# Altium PCB AD9834.PcbDoc
Units mil, origin at the board's own origin, x right, y up, seen from the top; angles counter-clockwise.
Board outline 1968.5 x 1771.65 mil, 2 copper layers (Top Layer, Bottom Layer); 42 components, 32 nets, 138 pads, 55 vias.
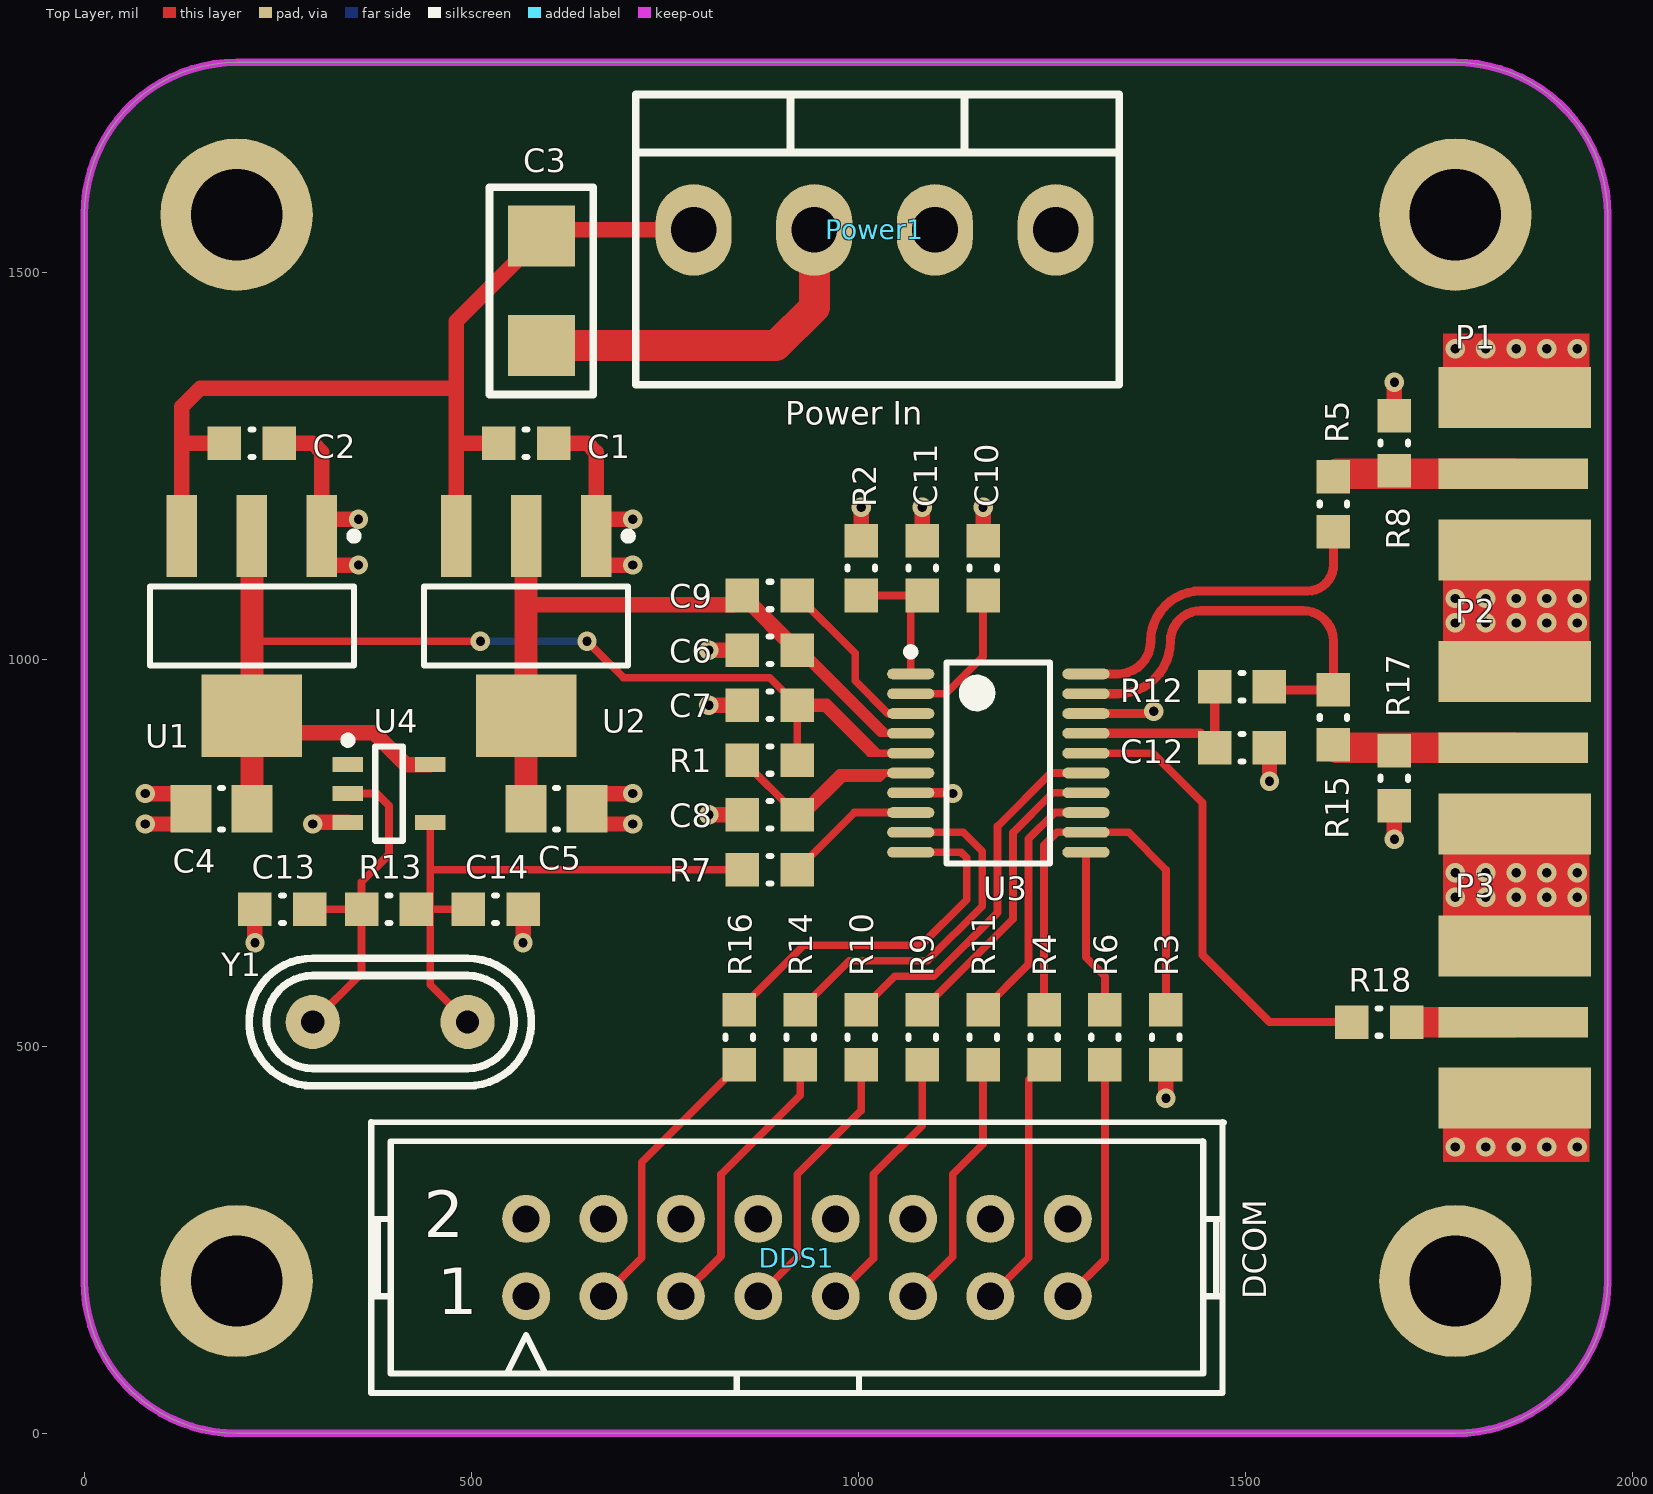
[diagram p0: Top Layer view]
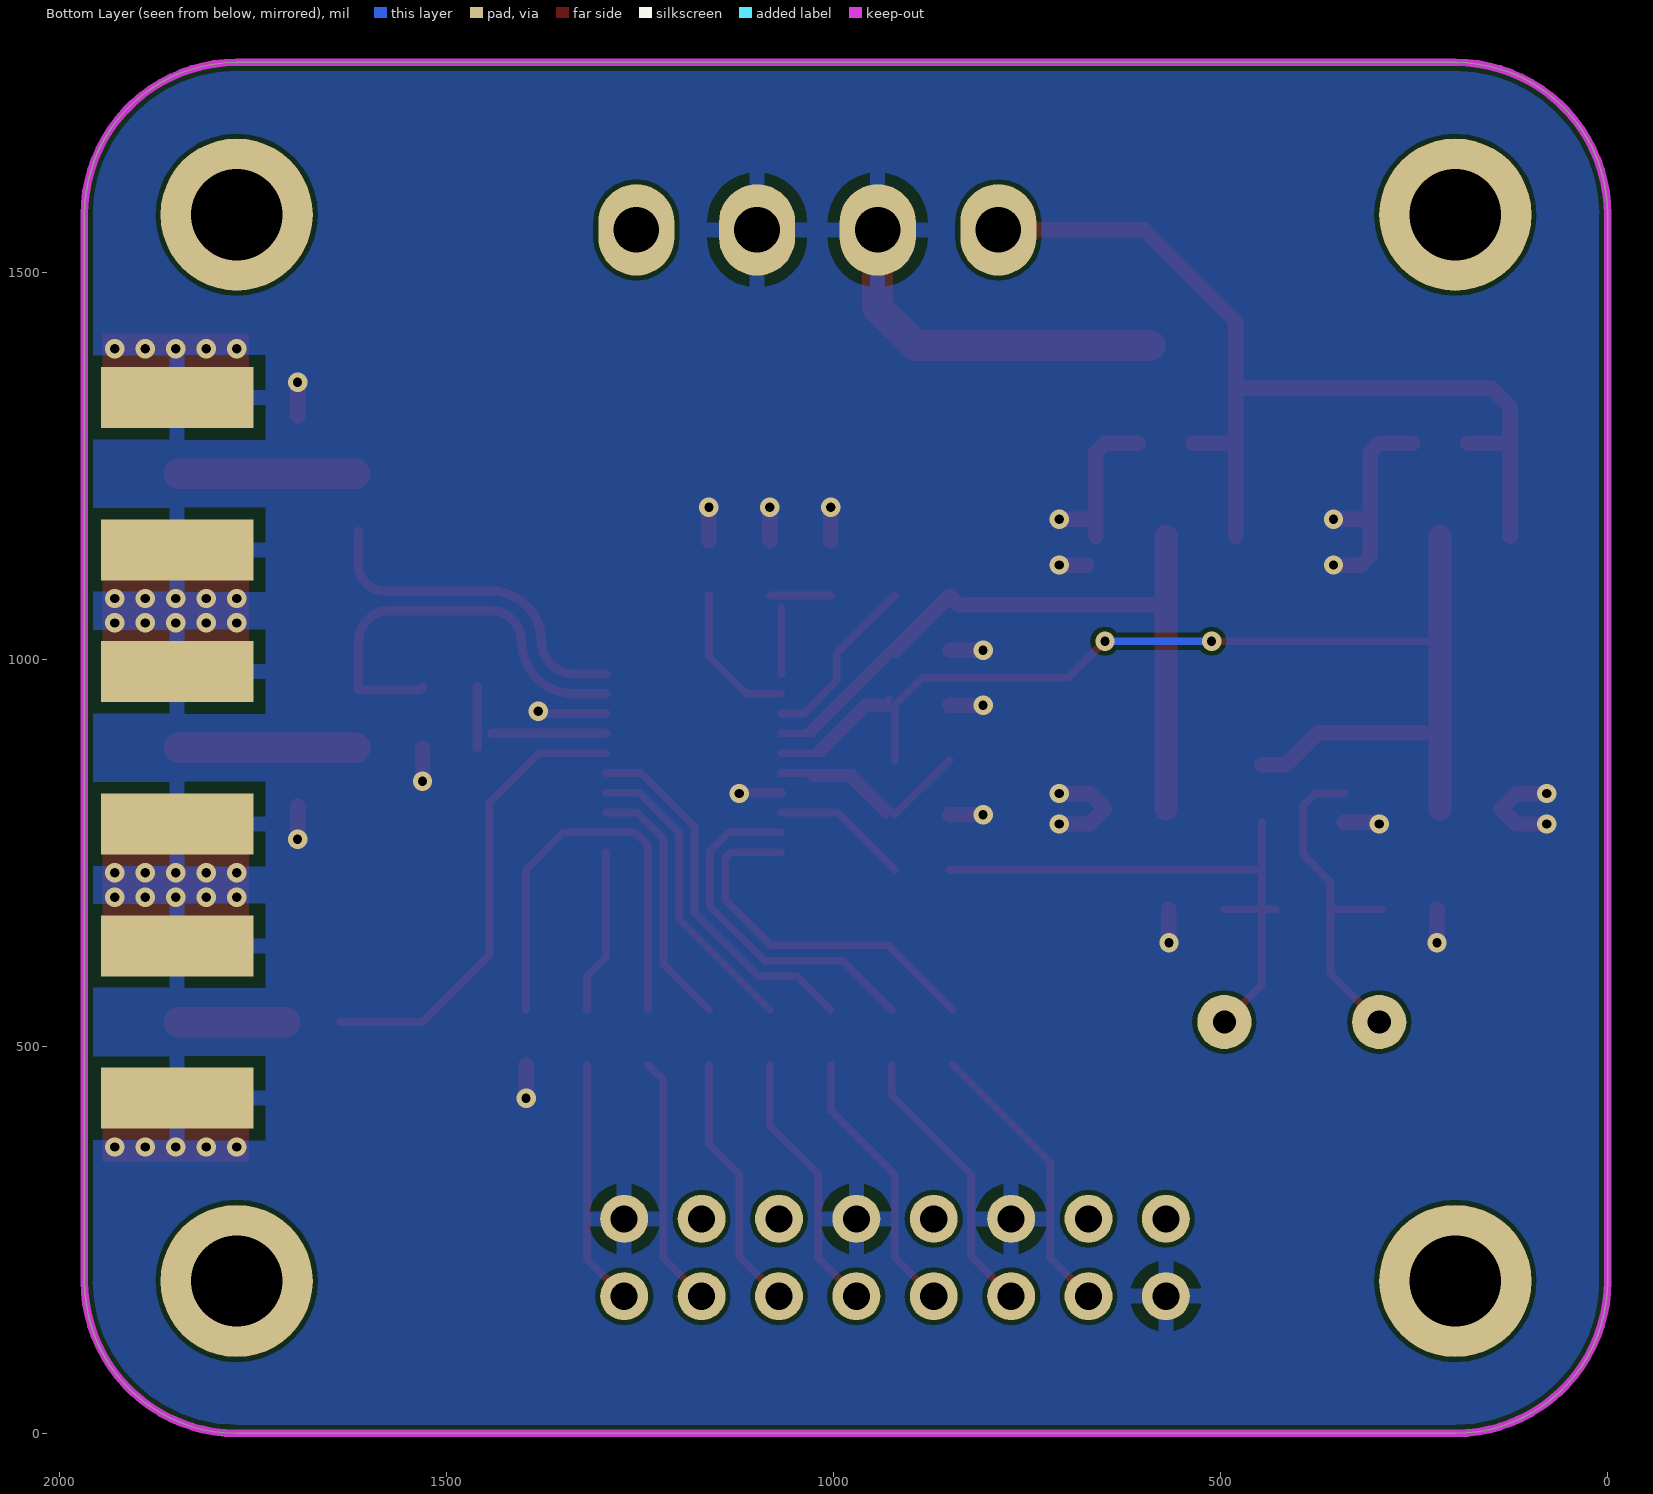
[diagram p1: Bottom Layer view, seen from below]

## Layer stack, top to bottom
Top Solder: solder mask 0.4, Solder Resist, Dk 3.5
Top Layer: signal copper 1.4
Dielectric 1: dielectric 12.6, FR-4, Dk 4.8
Bottom Layer: signal copper 1.4
Bottom Solder: solder mask 0.4, Solder Resist, Dk 3.5

## Board outline
196.85,0 cw(c196.85,196.85) 0,196.85 0,1574.8 cw(c196.85,1574.8) 196.85,1771.65 1771.65,1771.65 cw(c1771.65,1574.8) 1968.5,1574.8 1968.5,196.85 cw(c1771.65,196.85) 1771.65,0

## Design rules (kind name [scope] priority, off if disabled: settings)
Clearance [All] p1: gap=6
HoleSize [All] p1: absolutevalues=TRUE maxlimit=99999 minlimit=12 maxpercent=80.000 minpercent=20.000
PolygonConnect PolygonConnect_1 [IsVia] p1: connectstyle=Direct reliefconductorwidth=10 reliefentries=4 polygonreliefangle="90 Angle" airgapwidth=10
PolygonConnect [All] p2: connectstyle=Relief reliefconductorwidth=20 reliefentries=4 polygonreliefangle="90 Angle" airgapwidth=15
RoutingVias [All] p1: holewidth=12 width=25 viastyle="Through Hole" minholewidth=12 minwidth=25 maxholewidth=28000 maxwidth=50000
SolderMaskExpansion [All] p1: expansion=4
Width [All] p1: maxlimit=10000 minlimit=6 preferedwidth=10
29 further rules are at their usual default settings.

## Components (designator, comment, footprint, x,y, rotation, side; value= is the part's Value field where it differs from the comment)
C1 "100nF" CAPC0603(1608)55_M 570.87,1279.53 r180 top
C2 "100nF" CAPC0603(1608)55_M 216.54,1279.53 r180 top
C3 "100uF" CAPC3225 590.55,1476.38 r90 top
C4 "10uF" CAPC0805(2012)75_M 177.17,807.09 r0 top
C5 "10uF" CAPC0805(2012)75_M 610.24,807.09 r180 top
C6 "100nF" CAPC0603(1608)55_M 885.83,1011.81 r0 top
C7 "100nF" CAPC0603(1608)55_M 885.83,940.94 r0 top
C8 "100nF" CAPC0603(1608)55_M 885.83,799.21 r0 top
C9 "10nF" CAPC0603(1608)55_M 885.83,1082.68 r180 top
C10 "100nF" CAPC0603(1608)55_M 1161.42,1118.11 r90 top
C11 "100nF" CAPC0603(1608)55_M 1082.68,1118.11 r90 top
C12 "100pF" CAPC0603(1608)55_M 1496.06,885.83 r180 top
C13 "33pF" CAPC0603(1608)55_M 255.91,677.17 r0 top
C14 "33pF" CAPC0603(1608)55_M 531.5,677.17 r180 top
DDS1 "Header 8X2" Header8X2 570.87,177.17 r0 top
P1 "SMA" SMA-V 1948.82,1240.16 r180 top
P2 "SMA" SMA-V 1948.82,885.83 r180 top
P3 "SMA" SMA-V 1948.82,531.5 r180 top
Power1 "Header 4" 3.96-4 787.4,1555.12 r0 top
R1 "DNI" RESC0603(1608)_M 885.83,870.08 r180 top
R2 "6.8K" RESC0603(1608)_M 1003.94,1118.11 r270 top
R3 "1K" RESC0603(1608)_M 1397.64,511.81 r270 top
R4 "10R" RESC0603(1608)_M 1240.16,511.81 r270 top
R5 "150R" RESC0603(1608)_M 1614.17,1200.79 r270 top
R6 "10R" RESC0603(1608)_M 1318.9,511.81 r270 top
R7 "10R" RESC0603(1608)_M 885.83,728.35 r180 top
R8 "49R9" RESC0603(1608)_M 1692.91,1279.53 r90 top
R9 "10R" RESC0603(1608)_M 1082.68,511.81 r270 top
R10 "10R" RESC0603(1608)_M 1003.94,511.81 r270 top
R11 "10R" RESC0603(1608)_M 1161.42,511.81 r270 top
R12 "30K" RESC0603(1608)_M 1496.06,964.57 r180 top
R13 "1M" RESC0603(1608)_M 393.7,677.17 r180 top
R14 "10R" RESC0603(1608)_M 925.2,511.81 r270 top
R15 "150R" RESC0603(1608)_M 1614.17,925.2 r90 top
R16 "10R" RESC0603(1608)_M 846.46,511.81 r270 top
R17 "49R9" RESC0603(1608)_M 1692.91,846.46 r270 top
R18 "49R9" RESC0603(1608)_M 1673.23,531.5 r180 top
U1 "AMS1117-3.3" SOT-223_M 216.54,1043.31 r270 top
U2 "AMS1117-3.3" SOT-223_M 570.87,1043.31 r270 top
U3 "AD9834CRUZ" RU-20 1181.1,866.14 r0 top
U4 "74LVC1G04" SOT753 393.7,826.77 r0 top
Y1 "XTAL" HC-49S 295.28,531.5 r0 top

## Footprints (in the part's own frame and the unit in brackets; to place one, negate y for a bottom-side part, rotate by r counter-clockwise, add the part's x,y. Pads: shape width x height; smd on the part's side, far side on the other; paste and mask are expansions set on the pad)
3.96-4 [mm]
  oval 2.5x3 hole 1.5: 1(0,0) 2(3.96,0) 3(7.92,0) 4(11.88,0)
  silkscreen extent -1.91,-5.08 13.97,4.44, body extent -1.9,-5.08 13.97,4.44, height 12
CAPC0603(1608)55_M [mm] "Chip Capacitor, Body 1.6x0.8mm, Height 0.55mm, IPC Low Density"
  rect 1.1x1.1 smd: 1(-0.9,0) 2(0.9,0)
  silkscreen extent -0.05,-0.45 0.05,0.45, body extent -0.87,-0.47 0.88,0.48, height 0.55
CAPC0805(2012)75_M [mm] "Chip Capacitor, Body 2.0x1.2mm, Height 0.75mm, IPC Low Density"
  rect 1.35x1.55 smd: 1(-1,0) 2(1,0)
  silkscreen extent -0.05,-0.67 0.05,0.67, body extent -1.1,-0.72 1.1,0.72, height 0.75
CAPC3225 [mm] "SMT Capacitor, 2 Leads, Body 3.5x2.8mm"
  rect 2x2.2 smd: 1(-1.8,0) 2(1.8,0)
  silkscreen extent -3.4,-1.7 3.4,1.7, body extent -1.6,-1.3 1.6,1.3, height 2.5
HC-49S [mil]
  round 70 hole 30: 1(0,0) 2(200,0)
  silkscreen extent -82,-82 282,82, body extent -82,-82 282,82, height 118
Header8X2 [mil]
  round 62 hole 35: 1(0,0) 2(0,100) 3(100,0) 4(100,100) 5(200,0) 6(200,100) 7(300,0) 8(300,100) 9(400,0) 10(400,100) 11(500,0) 12(500,100) 13(600,0) 14(600,100) 15(700,0) 16(700,100)
  silkscreen extent -200,-125 902,225
RESC0603(1608)_M [mm] "Chip Resistor, Body 1.6x0.8mm, IPC Low Density"
  rect 1.1x1.1 smd: 1(-0.9,0) 2(0.9,0)
  silkscreen extent -0.05,-0.45 0.05,0.45, body extent -0.85,-0.47 0.85,0.47, height 0.6
RU-20 [mm] "SOP, 20-Leads, Body 6.5x4.4mm, Pitch 0.65mm, IPC Medium Density"
  oval 1.55x0.35 smd: 1(-2.875,2.925) 2(-2.875,2.275) 3(-2.875,1.625) 4(-2.875,0.975) 5(-2.875,0.325) 6(-2.875,-0.325) 7(-2.875,-0.975) 8(-2.875,-1.625) 9(-2.875,-2.275) 10(-2.875,-2.925) 11(2.875,-2.925) 12(2.875,-2.275) 13(2.875,-1.625) 14(2.875,-0.975) 15(2.875,-0.325) 16(2.875,0.325) 17(2.875,0.975) 18(2.875,1.625) 19(2.875,2.275) 20(2.875,2.925)
  silkscreen extent -3,-3.3 1.7,3.77, body extent -2.25,-3.3 2.25,3.3, height 1.2
SMA-V [mm]
  rect 4.9x1 smd: 1(2.6,0)
  rect 5x2 smd: 2(2.55,2.5) 2(2.55,-2.5)
  rect 5x2 smd far side: 2(2.55,2.5) 2(2.55,-2.5)
SOT753 [mm] "SOT23, 5-Leads, Body 2.90x2.75mm, Pitch 0.95mm, IPC Medium Density"
  rect 1x0.5 smd: 1(-1.35,0.95) 2(-1.35,0) 3(-1.35,-0.95) 4(1.35,-0.95) 5(1.35,0.95)
  silkscreen extent -1.47,-1.55 0.45,1.87, body extent -1.5,-1.55 1.5,1.55, height 1.1
SOT-223_M [mm] "SOT223, 4-Leads, Body 6.5x3.5mm, Pitch 2.3mm, Lead Span 7mm, IPC Low Density"
  rect 2.7x1 smd: 1(-2.95,2.3) 2(-2.95,0) 3(-2.95,-2.3)
  rect 2.7x3.3 smd: 2(2.95,0)
  silkscreen extent -3.07,-3.35 1.3,3.48, body extent -1.85,-3.35 1.85,3.35, height 1.8

## Part data
C1 C2 C3 C4 C5 C6 C7 C8 C9 C10 C11 C12 C13 C14: library part CAP
DDS1: "Header, 8-Pin, Dual row"
Power1: "Header, 4-Pin"
R1 R2 R3 R4 R5 R6 R7 R8 R9 R10 R11 R12 R13 R14 R15 R16 R17 R18: library part RES
U1 U2: library part AMS1117
Y1: "Crystal Oscillator"

## Free pads (board coordinates)
  round 196.85 hole 118.11: 0(196.85,196.85) 1(1771.65,196.85) 2(1771.65,1574.8) 3(196.85,1574.8)

## Via types
v1: diameter 25, hole 12, Top Layer to Bottom Layer, tented both sides, 55 vias

## Nets (pads, with @x,y where several pads share a name; then routed paths per layer and width w, separated by ;. In a path a pad name is that pad's centre, name@x,y a point inside that pad or via, vN(x,y) a via of type N, cw(c..) or ccw(c..) an arc to the next point about the centre after c; other vN are vias at no path point)
+3.3VA: C5.2 C6.2 C9.2 U2.2 U3.4 | length 1087.7
  Top Layer w10: U3.4 1036.42,904.53 ; 1036.42,904.53 1028.54,904.53 C6.2 929.13,1011.81 1036.42,904.53
  Top Layer w20: 570.87,1070.87 838.58,1070.87 C9.2 C6.2
  Top Layer w30: C5.2 570.87,927.17 570.87,1070.87 U2.2@570.87,1159.45
+3.3VD: C4.2 C7.2 R1.1 U1.2 U3.5 U4.5 | length 1686
  Top Layer w10: 216.54,1023.62 v1(511.81,1023.62) ; v1(649.61,1023.62) 696.85,976.38 885.83,976.38 C7.2 ; R1.1 C7.2 ; C7.2@929.13,948.82 933.07,944.88 959.9,944.88 1025.85,878.94 ; U3.5 1025.85,878.94 ; C7.2 925.2,937.01 956.69,937.01 1014.76,878.94 1025.85,878.94
  Top Layer w20: U1.2@238.19,905.51 374.02,905.51 415.35,864.17 U4.5
  Top Layer w30: C4.2 216.54,927.17 216.54,1023.62 U1.2@216.54,1159.45
  Bottom Layer w10: v1(511.81,1023.62) v1(649.61,1023.62)
+5VA: C1.2 C2.2 C3.2 Power1.1 U1.3 U2.3 | length 1275.2
  Top Layer w20: U1.3 125.98,1279.53 ; C2.2 125.98,1279.53 ; U2.3 480.31,1350.39 ; 480.32,1279.53 C1.2 ; Power1.1 598.43,1555.12 C3.2 480.31,1437.01 480.31,1350.39 ; 125.98,1279.53 125.98,1326.77 149.61,1350.39 480.31,1350.39
FSELECT: DDS1.5 R14.2 | length 363.1
  Top Layer w10: DDS1.5 822.83,229.13 822.83,334.65 925.2,437.01 R14.2
FSYNC: DDS1.7 R10.2 | length 354.3
  Top Layer w10: DDS1.7 921.26,227.56 921.26,334.65 1003.94,417.32 R10.2
GND: C1.1 C2.1 C3.1 C4.1 C5.1 C6.1 C7.1 C8.1 C10.2 C11.2 C12.1 C13.1 C14.1 DDS1.1 DDS1.6 DDS1.10 DDS1.16 P1.2 P2.2 P3.2 Power1.2 Power1.3 R2.1 R3.2 R8.2 R17.2 U1.1 U2.1 U3.7 U3.18 U4.3 | length 1995.5
  Top Layer w12: U3.7 1121.06,827.76 v1(1122.05,826.77) ; U3.18 1378.94,930.12 v1(1381.89,933.07)
  Top Layer w20: v1(78.74,787.4) 118.11,787.4 C4.1 118.11,826.77 v1(78.74,826.77) ; v1(220.47,633.86) C13.1 ; C2.1 295.28,1279.53 307.09,1267.72 U1.1@307.09,1181.1 ; v1(295.28,787.4) 297.24,789.37 U4.3 ; v1(354.33,1122.05) 318.9,1122.05 307.09,1133.86 U1.1 U1.1@307.09,1181.1 ; v1(354.33,1181.1) U1.1@307.09,1181.1 ; v1(566.93,633.86) C14.1 ; C1.1 649.61,1279.53 661.42,1267.72 U2.1 ; U2.1@661.42,1181.1 v1(708.66,1181.1) ; U2.1@673.23,1122.05 v1(708.66,1122.05) ; v1(708.66,787.4) 669.29,787.4 C5.1 669.29,826.77 v1(708.66,826.77) ; v1(807.09,799.21) C8.1 ; v1(807.09,940.94) C7.1 ; v1(807.09,1011.81) C6.1 ; R2.1 v1(1003.94,1196.85) ; C11.2 v1(1082.68,1196.85) ; C10.2 v1(1161.42,1196.85) ; v1(1397.64,433.07) R3.2 ; v1(1531.5,842.52) C12.1 ; v1(1692.91,767.72) R17.2 ; R8.2 v1(1692.91,1358.27)
  Top Layer w40: C3.1 893.7,1405.51 943.31,1455.12 Power1.2
  other v1: 1771.65,370.08 1811.02,370.08 1850.39,370.08 1889.76,370.08 1929.13,370.08 1771.65,692.91 1811.02,692.91 1850.39,692.91 1889.76,692.91 1929.13,692.91 1771.65,724.41 1811.02,724.41 1850.39,724.41 1889.76,724.41 1929.13,724.41 1771.65,1047.24 1811.02,1047.24 1850.39,1047.24 1889.76,1047.24 1929.13,1047.24 1771.65,1078.74 1811.02,1078.74 1850.39,1078.74 1889.76,1078.74 1929.13,1078.74 1771.65,1401.57 1811.02,1401.57 1850.39,1401.57 1889.76,1401.57 1929.13,1401.57
NetC8_2: C8.2 R1.2 U3.6 | length 393.1
  Top Layer w10: R1.2 C8.2 975.39,853.35 1034.45,853.35 ; C8.2@933.07,799.21 980.31,846.46 1027.56,846.46 1034.45,853.35 ; U3.6 1034.45,853.35
NetC9_1: C9.1 U3.3 | length 230.6
  Top Layer w10: C9.1 996.06,1007.87 996.06,972.44 1038.39,930.12 U3.3
NetC10_1: C10.1 U3.2 | length 192.2
  Top Layer w10: U3.2 1113.19,955.71 1161.42,1003.94 C10.1
NetC11_1: C11.1 R2.2 U3.1 | length 165.4
  Top Layer w10: R2.2 C11.1 ; U3.1 C11.1@1067.91,1067.91
NetC12_2: C12.2 R12.2 U3.17 | length 226.4
  Top Layer w12: U3.17 C12.2@1441.93,904.53 ; C12.2 R12.2
NetC13_2: C13.2 R13.2 U4.2 Y1.1 | length 446.9
  Top Layer w10: C13.2 R13.2 ; Y1.1 358.27,594.49 358.27,712.6 393.7,748.03 393.7,811.02 377.95,826.77 U4.2
NetC14_2: C14.2 R7.2 R13.1 U4.4 Y1.2 | length 747.4
  Top Layer w10: R13.1 446.85,677.17 C14.2 ; U4.4 446.85,669.29 446.85,579.92 Y1.2 ; 447.83,728.35 R7.2
NetP1_1: P1.1 R5.1 R8.1 | length 228.3
  Top Layer w39.37: R5.1@1618.11,1240.16 P1.1
NetP2_1: P2.1 R15.1 R17.1 | length 228.3
  Top Layer w39.37: R15.1@1618.11,885.83 P2.1
NetP3_1: P3.1 R18.1 | length 137.8
  Top Layer w39.37: R18.1 P3.1
NetR3_1: R3.1 R4.1 U3.12 | length 578.1
  Top Layer w10: R4.1 1240.16,759.84 1256.89,776.57 U3.12 1349.41,776.57 1397.64,728.35 R3.1
NetR5_2: R5.2 U3.20 | length 443.5
  Top Layer w12: U3.20 1335.63,981.3 ccw(c1335.63,1023.62) 1377.95,1023.62 cw(c1442.91,1023.62) 1442.91,1088.58 1580.71,1088.58 ccw(c1580.71,1122.05) 1614.17,1122.05 R5.2
NetR6_1: R6.1 U3.11 | length 213.9
  Top Layer w10: U3.11 1294.29,615.16 1318.9,590.55 R6.1
NetR7_1: R7.1 U3.8 | length 177.2
  Top Layer w10: R7.1 995.08,802.17 U3.8
NetR9_1: R9.1 U3.14 | length 393.2
  Top Layer w10: R9.1 1200.16,664.72 1200.16,776.41 1251.5,827.76 U3.14
NetR10_1: R10.1 U3.15 | length 482.6
  Top Layer w10: R10.1 1047.24,590.55 1097.7,590.55 1180.16,673.01 1180.16,784.7 1248.81,853.35 U3.15
NetR11_1: R11.1 U3.13 | length 333.4
  Top Layer w10: R11.1 1220.16,605.98 1220.16,768.13 1254.2,802.17 U3.13
NetR12_1: R12.1 R15.2 U3.19 | length 550.9
  Top Layer w12: U3.19 1335.63,955.71 ccw(c1335.63,1023.62) 1403.54,1023.62 cw(c1442.91,1023.62) 1442.91,1062.99 1574.8,1062.99 cw(c1574.8,1023.62) 1614.17,1023.62 R15.2 1535.43,960.63 R12.1
NetR14_1: R14.1 U3.9 | length 463.6
  Top Layer w10: R14.1 988.5,610.55 1089.42,610.55 1160.16,681.29 1160.16,751.97 1135.55,776.57 U3.9
NetR16_1: R16.1 U3.10 | length 482
  Top Layer w10: R16.1 929.76,630.55 1081.13,630.55 1140.16,689.58 1140.16,743.68 1132.86,750.98 U3.10
NetR18_2: R18.2 U3.16 | length 602.7
  Top Layer w10: U3.16 1380.91,878.94 1444.88,814.96 1444.88,618.11 1531.5,531.5 R18.2
PSELECT: DDS1.3 R16.2 | length 371.9
  Top Layer w10: DDS1.3 720.47,226.77 720.47,350.39 R16.2
RESET: DDS1.15 R6.2 | length 319.1
  Top Layer w10: DDS1.15 1318.9,225.2 R6.2
SCLK: DDS1.9 R9.2 | length 345.5
  Top Layer w10: DDS1.9 1019.68,225.98 1019.68,334.65 1082.68,397.64 R9.2
SDATA: DDS1.11 R11.2 | length 336.7
  Top Layer w10: DDS1.11 1122.05,228.35 1122.05,334.65 1161.42,374.02 R11.2
SLEEP: DDS1.13 R4.2 | length 327.9
  Top Layer w10: DDS1.13 1220.47,226.77 1220.47,456.69 R4.2
pads on no net: DDS1.2 DDS1.4 DDS1.8 DDS1.12 DDS1.14 Power1.4 U4.1

## Polygon pours and split planes (outlines as drawn)
GND on Bottom Layer "Top Layer-No Net" (solid, remove dead copper, pour order 0): 0,0 1968.5,0 1968.5,1771.65 0,1771.65

## Keep-outs
Keep-Out Layer:
  the board outline again, w10

## Other copper
Top Layer:
  rectangle net GND: 1755.91,350.39 1944.88,401.58
  rectangle net GND: 1755.91,661.42 1944.88,712.6
  rectangle net GND: 1755.91,704.72 1944.88,755.91
  rectangle net GND: 1755.91,1059.06 1944.88,1110.24
  rectangle net GND: 1755.91,1015.75 1944.88,1066.93
  rectangle net GND: 1755.91,1370.08 1944.88,1421.26

## Silkscreen, mask and mechanical layers (free items; w line width, h text height)
Top Overlay:
  text "Power In" at 905.51,1303.15 h30
  text "DCOM" at 1527.56,173.23 h30 r90

## Text inside footprints (layer, text, board x,y; h text height)
DDS1: Top Overlay "1" at 455.87,154.17 h60; Top Overlay "2" at 438.87,253.17 h60